# EAGLE board UCirKitBreadboardWithEverything2 (EAGLE 7.3.0), part 1 of 2

Size 72.75 x 99.36 mm. Coordinates in mm from the lower left corner, seen from the top.
Outline: 0,0 72.75,0 72.75,99.36 0,99.36 0,0
Copper layers (1*16): Top 0.035mm / dielectric 1.5mm / Bottom 0.035mm
Design rules "default": minimum track width 10mil, minimum drill 24mil, track to track 8mil, track to pad 8mil, pad to pad 8mil, via to via 8mil, smd to smd 8mil, copper to edge 40mil, drill to drill 8mil, minimum pad ring 10mil, minimum via ring 8mil, stop-mask expansion 4mil, vias tented up to drill 0mil, thermal gap 10mil
Holes 3 mm at 56.11,85.53 17.2,85.34 17.24,8.21 56.07,8.21

## Footprints (pad centres in the part's own frame; a part is rotated, then mirrored left to right if it is on the bottom)
1X01_SMD_3.25X0.85MM_NO_SILK = smd 3.25 x 0.85: P$3 0,0

## Placement (x,y rotation side)
JP301  [1X01_SMD_3.25X0.85MM_NO_SILK]  21.34,83.86 0 top
JP302  [1X01_SMD_3.25X0.85MM_NO_SILK]  24.72,83.86 0 top
JP303  [1X01_SMD_3.25X0.85MM_NO_SILK]  28.1,83.86 0 top
JP304  [1X01_SMD_3.25X0.85MM_NO_SILK]  31.48,83.86 0 top
JP305  [1X01_SMD_3.25X0.85MM_NO_SILK]  34.86,83.86 0 top
JP306  [1X01_SMD_3.25X0.85MM_NO_SILK]  38.24,83.86 0 top
JP307  [1X01_SMD_3.25X0.85MM_NO_SILK]  41.62,83.86 0 top
JP308  [1X01_SMD_3.25X0.85MM_NO_SILK]  45,83.86 0 top
JP309  [1X01_SMD_3.25X0.85MM_NO_SILK]  48.38,83.86 0 top
JP310  [1X01_SMD_3.25X0.85MM_NO_SILK]  51.76,83.86 0 top
JP311  [1X01_SMD_3.25X0.85MM_NO_SILK]  21.34,81.32 0 top
JP312  [1X01_SMD_3.25X0.85MM_NO_SILK]  24.72,81.32 0 top
JP313  [1X01_SMD_3.25X0.85MM_NO_SILK]  28.1,81.32 0 top
JP314  [1X01_SMD_3.25X0.85MM_NO_SILK]  31.48,81.32 0 top
JP315  [1X01_SMD_3.25X0.85MM_NO_SILK]  34.86,81.32 0 top
JP316  [1X01_SMD_3.25X0.85MM_NO_SILK]  38.24,81.32 0 top
JP317  [1X01_SMD_3.25X0.85MM_NO_SILK]  41.62,81.32 0 top
JP318  [1X01_SMD_3.25X0.85MM_NO_SILK]  45,81.32 0 top
JP319  [1X01_SMD_3.25X0.85MM_NO_SILK]  48.38,81.32 0 top
JP320  [1X01_SMD_3.25X0.85MM_NO_SILK]  51.76,81.32 0 top
JP321  [1X01_SMD_3.25X0.85MM_NO_SILK]  21.34,78.78 0 top
JP322  [1X01_SMD_3.25X0.85MM_NO_SILK]  24.72,78.78 0 top
JP323  [1X01_SMD_3.25X0.85MM_NO_SILK]  28.1,78.78 0 top
JP324  [1X01_SMD_3.25X0.85MM_NO_SILK]  31.48,78.78 0 top
JP325  [1X01_SMD_3.25X0.85MM_NO_SILK]  34.86,78.78 0 top
JP326  [1X01_SMD_3.25X0.85MM_NO_SILK]  38.24,78.78 0 top
JP327  [1X01_SMD_3.25X0.85MM_NO_SILK]  41.62,78.78 0 top
JP328  [1X01_SMD_3.25X0.85MM_NO_SILK]  45,78.78 0 top
JP329  [1X01_SMD_3.25X0.85MM_NO_SILK]  48.38,78.78 0 top
JP330  [1X01_SMD_3.25X0.85MM_NO_SILK]  51.76,78.78 0 top
JP331  [1X01_SMD_3.25X0.85MM_NO_SILK]  21.34,76.24 0 top
JP332  [1X01_SMD_3.25X0.85MM_NO_SILK]  24.72,76.24 0 top
JP333  [1X01_SMD_3.25X0.85MM_NO_SILK]  28.1,76.24 0 top
JP334  [1X01_SMD_3.25X0.85MM_NO_SILK]  31.48,76.24 0 top
JP335  [1X01_SMD_3.25X0.85MM_NO_SILK]  34.86,76.24 0 top
JP336  [1X01_SMD_3.25X0.85MM_NO_SILK]  38.24,76.24 0 top
JP337  [1X01_SMD_3.25X0.85MM_NO_SILK]  41.62,76.24 0 top
JP338  [1X01_SMD_3.25X0.85MM_NO_SILK]  45,76.24 0 top
JP339  [1X01_SMD_3.25X0.85MM_NO_SILK]  48.38,76.24 0 top
JP340  [1X01_SMD_3.25X0.85MM_NO_SILK]  51.76,76.24 0 top
JP341  [1X01_SMD_3.25X0.85MM_NO_SILK]  21.34,73.7 0 top
JP342  [1X01_SMD_3.25X0.85MM_NO_SILK]  24.72,73.7 0 top
JP343  [1X01_SMD_3.25X0.85MM_NO_SILK]  28.1,73.7 0 top
JP344  [1X01_SMD_3.25X0.85MM_NO_SILK]  31.48,73.7 0 top
JP345  [1X01_SMD_3.25X0.85MM_NO_SILK]  34.86,73.7 0 top
JP346  [1X01_SMD_3.25X0.85MM_NO_SILK]  38.24,73.7 0 top
JP347  [1X01_SMD_3.25X0.85MM_NO_SILK]  41.62,73.7 0 top
JP348  [1X01_SMD_3.25X0.85MM_NO_SILK]  45,73.7 0 top
JP349  [1X01_SMD_3.25X0.85MM_NO_SILK]  48.38,73.7 0 top
JP350  [1X01_SMD_3.25X0.85MM_NO_SILK]  51.76,73.7 0 top
JP351  [1X01_SMD_3.25X0.85MM_NO_SILK]  21.34,71.16 0 top
JP352  [1X01_SMD_3.25X0.85MM_NO_SILK]  24.72,71.16 0 top
JP353  [1X01_SMD_3.25X0.85MM_NO_SILK]  28.1,71.16 0 top
JP354  [1X01_SMD_3.25X0.85MM_NO_SILK]  31.48,71.16 0 top
JP355  [1X01_SMD_3.25X0.85MM_NO_SILK]  34.86,71.16 0 top
JP356  [1X01_SMD_3.25X0.85MM_NO_SILK]  38.24,71.16 0 top
JP357  [1X01_SMD_3.25X0.85MM_NO_SILK]  41.62,71.16 0 top
JP358  [1X01_SMD_3.25X0.85MM_NO_SILK]  45,71.16 0 top
JP359  [1X01_SMD_3.25X0.85MM_NO_SILK]  48.38,71.16 0 top
JP360  [1X01_SMD_3.25X0.85MM_NO_SILK]  51.76,71.16 0 top
JP361  [1X01_SMD_3.25X0.85MM_NO_SILK]  21.34,68.62 0 top
JP362  [1X01_SMD_3.25X0.85MM_NO_SILK]  24.72,68.62 0 top
JP363  [1X01_SMD_3.25X0.85MM_NO_SILK]  28.1,68.62 0 top
JP364  [1X01_SMD_3.25X0.85MM_NO_SILK]  31.48,68.62 0 top
JP365  [1X01_SMD_3.25X0.85MM_NO_SILK]  34.86,68.62 0 top
JP366  [1X01_SMD_3.25X0.85MM_NO_SILK]  38.24,68.62 0 top
JP367  [1X01_SMD_3.25X0.85MM_NO_SILK]  41.62,68.62 0 top
JP368  [1X01_SMD_3.25X0.85MM_NO_SILK]  45,68.62 0 top
JP369  [1X01_SMD_3.25X0.85MM_NO_SILK]  48.38,68.62 0 top
JP370  [1X01_SMD_3.25X0.85MM_NO_SILK]  51.76,68.62 0 top
JP371  [1X01_SMD_3.25X0.85MM_NO_SILK]  21.34,66.08 0 top
JP372  [1X01_SMD_3.25X0.85MM_NO_SILK]  24.72,66.08 0 top
JP373  [1X01_SMD_3.25X0.85MM_NO_SILK]  28.1,66.08 0 top
JP374  [1X01_SMD_3.25X0.85MM_NO_SILK]  31.48,66.08 0 top
JP375  [1X01_SMD_3.25X0.85MM_NO_SILK]  34.86,66.08 0 top
JP376  [1X01_SMD_3.25X0.85MM_NO_SILK]  38.24,66.08 0 top
JP377  [1X01_SMD_3.25X0.85MM_NO_SILK]  41.62,66.08 0 top
JP378  [1X01_SMD_3.25X0.85MM_NO_SILK]  45,66.08 0 top
JP379  [1X01_SMD_3.25X0.85MM_NO_SILK]  48.38,66.08 0 top
JP380  [1X01_SMD_3.25X0.85MM_NO_SILK]  51.76,66.08 0 top
JP381  [1X01_SMD_3.25X0.85MM_NO_SILK]  21.34,63.54 0 top
JP382  [1X01_SMD_3.25X0.85MM_NO_SILK]  24.72,63.54 0 top
JP383  [1X01_SMD_3.25X0.85MM_NO_SILK]  28.1,63.54 0 top
JP384  [1X01_SMD_3.25X0.85MM_NO_SILK]  31.48,63.54 0 top
JP385  [1X01_SMD_3.25X0.85MM_NO_SILK]  34.86,63.54 0 top
JP386  [1X01_SMD_3.25X0.85MM_NO_SILK]  38.24,63.54 0 top
JP387  [1X01_SMD_3.25X0.85MM_NO_SILK]  41.62,63.54 0 top
JP388  [1X01_SMD_3.25X0.85MM_NO_SILK]  45,63.54 0 top
JP389  [1X01_SMD_3.25X0.85MM_NO_SILK]  48.38,63.54 0 top
JP390  [1X01_SMD_3.25X0.85MM_NO_SILK]  51.76,63.54 0 top
JP391  [1X01_SMD_3.25X0.85MM_NO_SILK]  21.34,61 0 top
JP392  [1X01_SMD_3.25X0.85MM_NO_SILK]  24.72,61 0 top
JP393  [1X01_SMD_3.25X0.85MM_NO_SILK]  28.1,61 0 top
JP394  [1X01_SMD_3.25X0.85MM_NO_SILK]  31.48,61 0 top
JP395  [1X01_SMD_3.25X0.85MM_NO_SILK]  34.86,61 0 top
JP396  [1X01_SMD_3.25X0.85MM_NO_SILK]  38.24,61 0 top
JP397  [1X01_SMD_3.25X0.85MM_NO_SILK]  41.62,61 0 top
JP398  [1X01_SMD_3.25X0.85MM_NO_SILK]  45,61 0 top
JP399  [1X01_SMD_3.25X0.85MM_NO_SILK]  48.38,61 0 top
JP400  [1X01_SMD_3.25X0.85MM_NO_SILK]  51.76,61 0 top
JP401  [1X01_SMD_3.25X0.85MM_NO_SILK]  21.34,58.46 0 top
JP402  [1X01_SMD_3.25X0.85MM_NO_SILK]  24.72,58.46 0 top
JP403  [1X01_SMD_3.25X0.85MM_NO_SILK]  28.1,58.46 0 top
JP404  [1X01_SMD_3.25X0.85MM_NO_SILK]  31.48,58.46 0 top
JP405  [1X01_SMD_3.25X0.85MM_NO_SILK]  34.86,58.46 0 top
JP406  [1X01_SMD_3.25X0.85MM_NO_SILK]  38.24,58.46 0 top
JP407  [1X01_SMD_3.25X0.85MM_NO_SILK]  41.62,58.46 0 top
JP408  [1X01_SMD_3.25X0.85MM_NO_SILK]  45,58.46 0 top
JP409  [1X01_SMD_3.25X0.85MM_NO_SILK]  48.38,58.46 0 top
JP410  [1X01_SMD_3.25X0.85MM_NO_SILK]  51.76,58.46 0 top
JP411  [1X01_SMD_3.25X0.85MM_NO_SILK]  21.34,55.92 0 top
JP412  [1X01_SMD_3.25X0.85MM_NO_SILK]  24.72,55.92 0 top
JP413  [1X01_SMD_3.25X0.85MM_NO_SILK]  28.1,55.92 0 top
JP414  [1X01_SMD_3.25X0.85MM_NO_SILK]  31.48,55.92 0 top
JP415  [1X01_SMD_3.25X0.85MM_NO_SILK]  34.86,55.92 0 top
JP416  [1X01_SMD_3.25X0.85MM_NO_SILK]  38.24,55.92 0 top
JP417  [1X01_SMD_3.25X0.85MM_NO_SILK]  41.62,55.92 0 top
JP418  [1X01_SMD_3.25X0.85MM_NO_SILK]  45,55.92 0 top
JP419  [1X01_SMD_3.25X0.85MM_NO_SILK]  48.38,55.92 0 top
JP420  [1X01_SMD_3.25X0.85MM_NO_SILK]  51.76,55.92 0 top
JP421  [1X01_SMD_3.25X0.85MM_NO_SILK]  21.34,53.38 0 top
JP422  [1X01_SMD_3.25X0.85MM_NO_SILK]  24.72,53.38 0 top
JP423  [1X01_SMD_3.25X0.85MM_NO_SILK]  28.1,53.38 0 top
JP424  [1X01_SMD_3.25X0.85MM_NO_SILK]  31.48,53.38 0 top
JP425  [1X01_SMD_3.25X0.85MM_NO_SILK]  34.86,53.38 0 top
JP426  [1X01_SMD_3.25X0.85MM_NO_SILK]  38.24,53.38 0 top
JP427  [1X01_SMD_3.25X0.85MM_NO_SILK]  41.62,53.38 0 top
JP428  [1X01_SMD_3.25X0.85MM_NO_SILK]  45,53.38 0 top
JP429  [1X01_SMD_3.25X0.85MM_NO_SILK]  48.38,53.38 0 top
JP430  [1X01_SMD_3.25X0.85MM_NO_SILK]  51.76,53.38 0 top
JP431  [1X01_SMD_3.25X0.85MM_NO_SILK]  21.34,50.84 0 top
JP432  [1X01_SMD_3.25X0.85MM_NO_SILK]  24.72,50.84 0 top
JP433  [1X01_SMD_3.25X0.85MM_NO_SILK]  28.1,50.84 0 top
JP434  [1X01_SMD_3.25X0.85MM_NO_SILK]  31.48,50.84 0 top
JP435  [1X01_SMD_3.25X0.85MM_NO_SILK]  34.86,50.84 0 top
JP436  [1X01_SMD_3.25X0.85MM_NO_SILK]  38.24,50.84 0 top
JP437  [1X01_SMD_3.25X0.85MM_NO_SILK]  41.62,50.84 0 top
JP438  [1X01_SMD_3.25X0.85MM_NO_SILK]  45,50.84 0 top
JP439  [1X01_SMD_3.25X0.85MM_NO_SILK]  48.38,50.84 0 top
JP440  [1X01_SMD_3.25X0.85MM_NO_SILK]  51.76,50.84 0 top
JP441  [1X01_SMD_3.25X0.85MM_NO_SILK]  21.34,48.3 0 top
JP442  [1X01_SMD_3.25X0.85MM_NO_SILK]  24.72,48.3 0 top
JP443  [1X01_SMD_3.25X0.85MM_NO_SILK]  28.1,48.3 0 top
JP444  [1X01_SMD_3.25X0.85MM_NO_SILK]  31.48,48.3 0 top
JP445  [1X01_SMD_3.25X0.85MM_NO_SILK]  34.86,48.3 0 top
JP446  [1X01_SMD_3.25X0.85MM_NO_SILK]  38.24,48.3 0 top
JP447  [1X01_SMD_3.25X0.85MM_NO_SILK]  41.62,48.3 0 top
JP448  [1X01_SMD_3.25X0.85MM_NO_SILK]  45,48.3 0 top
JP449  [1X01_SMD_3.25X0.85MM_NO_SILK]  48.38,48.3 0 top
JP450  [1X01_SMD_3.25X0.85MM_NO_SILK]  51.76,48.3 0 top
JP451  [1X01_SMD_3.25X0.85MM_NO_SILK]  21.34,45.76 0 top
JP452  [1X01_SMD_3.25X0.85MM_NO_SILK]  24.72,45.76 0 top
JP453  [1X01_SMD_3.25X0.85MM_NO_SILK]  28.1,45.76 0 top
JP454  [1X01_SMD_3.25X0.85MM_NO_SILK]  31.48,45.76 0 top
JP455  [1X01_SMD_3.25X0.85MM_NO_SILK]  34.86,45.76 0 top
JP456  [1X01_SMD_3.25X0.85MM_NO_SILK]  38.24,45.76 0 top
JP457  [1X01_SMD_3.25X0.85MM_NO_SILK]  41.62,45.76 0 top
JP458  [1X01_SMD_3.25X0.85MM_NO_SILK]  45,45.76 0 top
JP459  [1X01_SMD_3.25X0.85MM_NO_SILK]  48.38,45.76 0 top
JP460  [1X01_SMD_3.25X0.85MM_NO_SILK]  51.76,45.76 0 top
JP461  [1X01_SMD_3.25X0.85MM_NO_SILK]  21.34,43.22 0 top
JP462  [1X01_SMD_3.25X0.85MM_NO_SILK]  24.72,43.22 0 top
JP463  [1X01_SMD_3.25X0.85MM_NO_SILK]  28.1,43.22 0 top
JP464  [1X01_SMD_3.25X0.85MM_NO_SILK]  31.48,43.22 0 top
JP465  [1X01_SMD_3.25X0.85MM_NO_SILK]  34.86,43.22 0 top
JP466  [1X01_SMD_3.25X0.85MM_NO_SILK]  38.24,43.22 0 top
JP467  [1X01_SMD_3.25X0.85MM_NO_SILK]  41.62,43.22 0 top
JP468  [1X01_SMD_3.25X0.85MM_NO_SILK]  45,43.22 0 top
JP469  [1X01_SMD_3.25X0.85MM_NO_SILK]  48.38,43.22 0 top
JP470  [1X01_SMD_3.25X0.85MM_NO_SILK]  51.76,43.22 0 top
JP471  [1X01_SMD_3.25X0.85MM_NO_SILK]  21.34,40.68 0 top
JP472  [1X01_SMD_3.25X0.85MM_NO_SILK]  24.72,40.68 0 top
JP473  [1X01_SMD_3.25X0.85MM_NO_SILK]  28.1,40.68 0 top
JP474  [1X01_SMD_3.25X0.85MM_NO_SILK]  31.48,40.68 0 top
JP475  [1X01_SMD_3.25X0.85MM_NO_SILK]  34.86,40.68 0 top
JP476  [1X01_SMD_3.25X0.85MM_NO_SILK]  38.24,40.68 0 top
JP477  [1X01_SMD_3.25X0.85MM_NO_SILK]  41.62,40.68 0 top
JP478  [1X01_SMD_3.25X0.85MM_NO_SILK]  45,40.68 0 top
JP479  [1X01_SMD_3.25X0.85MM_NO_SILK]  48.38,40.68 0 top
JP480  [1X01_SMD_3.25X0.85MM_NO_SILK]  51.76,40.68 0 top
JP481  [1X01_SMD_3.25X0.85MM_NO_SILK]  21.34,38.14 0 top
JP482  [1X01_SMD_3.25X0.85MM_NO_SILK]  24.72,38.14 0 top
JP483  [1X01_SMD_3.25X0.85MM_NO_SILK]  28.1,38.14 0 top
JP484  [1X01_SMD_3.25X0.85MM_NO_SILK]  31.48,38.14 0 top
JP485  [1X01_SMD_3.25X0.85MM_NO_SILK]  34.86,38.14 0 top
JP486  [1X01_SMD_3.25X0.85MM_NO_SILK]  38.24,38.14 0 top
JP487  [1X01_SMD_3.25X0.85MM_NO_SILK]  41.62,38.14 0 top
JP488  [1X01_SMD_3.25X0.85MM_NO_SILK]  45,38.14 0 top
JP489  [1X01_SMD_3.25X0.85MM_NO_SILK]  48.38,38.14 0 top
JP490  [1X01_SMD_3.25X0.85MM_NO_SILK]  51.76,38.14 0 top
JP491  [1X01_SMD_3.25X0.85MM_NO_SILK]  21.34,35.6 0 top
JP492  [1X01_SMD_3.25X0.85MM_NO_SILK]  24.72,35.6 0 top
JP493  [1X01_SMD_3.25X0.85MM_NO_SILK]  28.1,35.6 0 top
JP494  [1X01_SMD_3.25X0.85MM_NO_SILK]  31.48,35.6 0 top
JP495  [1X01_SMD_3.25X0.85MM_NO_SILK]  34.86,35.6 0 top
JP496  [1X01_SMD_3.25X0.85MM_NO_SILK]  38.24,35.6 0 top
JP497  [1X01_SMD_3.25X0.85MM_NO_SILK]  41.62,35.6 0 top
JP498  [1X01_SMD_3.25X0.85MM_NO_SILK]  45,35.6 0 top
JP499  [1X01_SMD_3.25X0.85MM_NO_SILK]  48.38,35.6 0 top
JP500  [1X01_SMD_3.25X0.85MM_NO_SILK]  51.76,35.6 0 top
JP501  [1X01_SMD_3.25X0.85MM_NO_SILK]  21.34,33.06 0 top
JP502  [1X01_SMD_3.25X0.85MM_NO_SILK]  24.72,33.06 0 top
JP503  [1X01_SMD_3.25X0.85MM_NO_SILK]  28.1,33.06 0 top
JP504  [1X01_SMD_3.25X0.85MM_NO_SILK]  31.48,33.06 0 top
JP505  [1X01_SMD_3.25X0.85MM_NO_SILK]  34.86,33.06 0 top
JP506  [1X01_SMD_3.25X0.85MM_NO_SILK]  38.24,33.06 0 top
JP507  [1X01_SMD_3.25X0.85MM_NO_SILK]  41.62,33.06 0 top
JP508  [1X01_SMD_3.25X0.85MM_NO_SILK]  45,33.06 0 top
JP509  [1X01_SMD_3.25X0.85MM_NO_SILK]  48.38,33.06 0 top
JP510  [1X01_SMD_3.25X0.85MM_NO_SILK]  51.76,33.06 0 top
JP511  [1X01_SMD_3.25X0.85MM_NO_SILK]  21.34,30.52 0 top
JP512  [1X01_SMD_3.25X0.85MM_NO_SILK]  24.72,30.52 0 top
JP513  [1X01_SMD_3.25X0.85MM_NO_SILK]  28.1,30.52 0 top
JP514  [1X01_SMD_3.25X0.85MM_NO_SILK]  31.48,30.52 0 top
JP515  [1X01_SMD_3.25X0.85MM_NO_SILK]  34.86,30.52 0 top
JP516  [1X01_SMD_3.25X0.85MM_NO_SILK]  38.24,30.52 0 top
JP517  [1X01_SMD_3.25X0.85MM_NO_SILK]  41.62,30.52 0 top
JP518  [1X01_SMD_3.25X0.85MM_NO_SILK]  45,30.52 0 top
JP519  [1X01_SMD_3.25X0.85MM_NO_SILK]  48.38,30.52 0 top
JP520  [1X01_SMD_3.25X0.85MM_NO_SILK]  51.76,30.52 0 top
JP521  [1X01_SMD_3.25X0.85MM_NO_SILK]  21.34,27.98 0 top
JP522  [1X01_SMD_3.25X0.85MM_NO_SILK]  24.72,27.98 0 top
JP523  [1X01_SMD_3.25X0.85MM_NO_SILK]  28.1,27.98 0 top
JP524  [1X01_SMD_3.25X0.85MM_NO_SILK]  31.48,27.98 0 top
JP525  [1X01_SMD_3.25X0.85MM_NO_SILK]  34.86,27.98 0 top
JP526  [1X01_SMD_3.25X0.85MM_NO_SILK]  38.24,27.98 0 top
JP527  [1X01_SMD_3.25X0.85MM_NO_SILK]  41.62,27.98 0 top
JP528  [1X01_SMD_3.25X0.85MM_NO_SILK]  45,27.98 0 top
JP529  [1X01_SMD_3.25X0.85MM_NO_SILK]  48.38,27.98 0 top
JP530  [1X01_SMD_3.25X0.85MM_NO_SILK]  51.76,27.98 0 top
JP531  [1X01_SMD_3.25X0.85MM_NO_SILK]  21.34,25.44 0 top
JP532  [1X01_SMD_3.25X0.85MM_NO_SILK]  24.72,25.44 0 top
JP533  [1X01_SMD_3.25X0.85MM_NO_SILK]  28.1,25.44 0 top
JP534  [1X01_SMD_3.25X0.85MM_NO_SILK]  31.48,25.44 0 top
JP535  [1X01_SMD_3.25X0.85MM_NO_SILK]  34.86,25.44 0 top
JP536  [1X01_SMD_3.25X0.85MM_NO_SILK]  38.24,25.44 0 top
JP537  [1X01_SMD_3.25X0.85MM_NO_SILK]  41.62,25.44 0 top
JP538  [1X01_SMD_3.25X0.85MM_NO_SILK]  45,25.44 0 top
JP539  [1X01_SMD_3.25X0.85MM_NO_SILK]  48.38,25.44 0 top
JP540  [1X01_SMD_3.25X0.85MM_NO_SILK]  51.76,25.44 0 top
JP541  [1X01_SMD_3.25X0.85MM_NO_SILK]  21.34,22.9 0 top
JP542  [1X01_SMD_3.25X0.85MM_NO_SILK]  24.72,22.9 0 top
JP543  [1X01_SMD_3.25X0.85MM_NO_SILK]  28.1,22.9 0 top
JP544  [1X01_SMD_3.25X0.85MM_NO_SILK]  31.48,22.9 0 top
JP545  [1X01_SMD_3.25X0.85MM_NO_SILK]  34.86,22.9 0 top
JP546  [1X01_SMD_3.25X0.85MM_NO_SILK]  38.24,22.9 0 top
JP547  [1X01_SMD_3.25X0.85MM_NO_SILK]  41.62,22.9 0 top
JP548  [1X01_SMD_3.25X0.85MM_NO_SILK]  45,22.9 0 top
JP549  [1X01_SMD_3.25X0.85MM_NO_SILK]  48.38,22.9 0 top
JP550  [1X01_SMD_3.25X0.85MM_NO_SILK]  51.76,22.9 0 top
JP551  [1X01_SMD_3.25X0.85MM_NO_SILK]  21.34,20.36 0 top
JP552  [1X01_SMD_3.25X0.85MM_NO_SILK]  24.72,20.36 0 top
JP553  [1X01_SMD_3.25X0.85MM_NO_SILK]  28.1,20.36 0 top
JP554  [1X01_SMD_3.25X0.85MM_NO_SILK]  31.48,20.36 0 top
JP555  [1X01_SMD_3.25X0.85MM_NO_SILK]  34.86,20.36 0 top
JP556  [1X01_SMD_3.25X0.85MM_NO_SILK]  38.24,20.36 0 top
JP557  [1X01_SMD_3.25X0.85MM_NO_SILK]  41.62,20.36 0 top
JP558  [1X01_SMD_3.25X0.85MM_NO_SILK]  45,20.36 0 top
JP559  [1X01_SMD_3.25X0.85MM_NO_SILK]  48.38,20.36 0 top
JP560  [1X01_SMD_3.25X0.85MM_NO_SILK]  51.76,20.36 0 top
JP561  [1X01_SMD_3.25X0.85MM_NO_SILK]  21.34,17.82 0 top
JP562  [1X01_SMD_3.25X0.85MM_NO_SILK]  24.72,17.82 0 top
JP563  [1X01_SMD_3.25X0.85MM_NO_SILK]  28.1,17.82 0 top
JP564  [1X01_SMD_3.25X0.85MM_NO_SILK]  31.48,17.82 0 top
JP565  [1X01_SMD_3.25X0.85MM_NO_SILK]  34.86,17.82 0 top
JP566  [1X01_SMD_3.25X0.85MM_NO_SILK]  38.24,17.82 0 top
JP567  [1X01_SMD_3.25X0.85MM_NO_SILK]  41.62,17.82 0 top
JP568  [1X01_SMD_3.25X0.85MM_NO_SILK]  45,17.82 0 top
JP569  [1X01_SMD_3.25X0.85MM_NO_SILK]  48.38,17.82 0 top
JP570  [1X01_SMD_3.25X0.85MM_NO_SILK]  51.76,17.82 0 top
JP571  [1X01_SMD_3.25X0.85MM_NO_SILK]  21.34,15.28 0 top
JP572  [1X01_SMD_3.25X0.85MM_NO_SILK]  24.72,15.28 0 top
JP573  [1X01_SMD_3.25X0.85MM_NO_SILK]  28.1,15.28 0 top
JP574  [1X01_SMD_3.25X0.85MM_NO_SILK]  31.48,15.28 0 top
JP575  [1X01_SMD_3.25X0.85MM_NO_SILK]  34.86,15.28 0 top
JP576  [1X01_SMD_3.25X0.85MM_NO_SILK]  38.24,15.28 0 top
JP577  [1X01_SMD_3.25X0.85MM_NO_SILK]  41.62,15.28 0 top
JP578  [1X01_SMD_3.25X0.85MM_NO_SILK]  45,15.28 0 top
JP579  [1X01_SMD_3.25X0.85MM_NO_SILK]  48.38,15.28 0 top
JP580  [1X01_SMD_3.25X0.85MM_NO_SILK]  51.76,15.28 0 top
JP581  [1X01_SMD_3.25X0.85MM_NO_SILK]  21.34,12.74 0 top
JP582  [1X01_SMD_3.25X0.85MM_NO_SILK]  24.72,12.74 0 top
JP583  [1X01_SMD_3.25X0.85MM_NO_SILK]  28.1,12.74 0 top
JP584  [1X01_SMD_3.25X0.85MM_NO_SILK]  31.48,12.74 0 top
JP585  [1X01_SMD_3.25X0.85MM_NO_SILK]  34.86,12.74 0 top
JP586  [1X01_SMD_3.25X0.85MM_NO_SILK]  38.24,12.74 0 top
JP587  [1X01_SMD_3.25X0.85MM_NO_SILK]  41.62,12.74 0 top
JP588  [1X01_SMD_3.25X0.85MM_NO_SILK]  45,12.74 0 top
JP589  [1X01_SMD_3.25X0.85MM_NO_SILK]  48.38,12.74 0 top
JP590  [1X01_SMD_3.25X0.85MM_NO_SILK]  51.76,12.74 0 top
JP591  [1X01_SMD_3.25X0.85MM_NO_SILK]  21.34,10.2 0 top
JP592  [1X01_SMD_3.25X0.85MM_NO_SILK]  24.72,10.2 0 top
JP593  [1X01_SMD_3.25X0.85MM_NO_SILK]  28.1,10.2 0 top
JP594  [1X01_SMD_3.25X0.85MM_NO_SILK]  31.48,10.2 0 top
JP595  [1X01_SMD_3.25X0.85MM_NO_SILK]  34.86,10.2 0 top
JP596  [1X01_SMD_3.25X0.85MM_NO_SILK]  38.24,10.2 0 top
JP597  [1X01_SMD_3.25X0.85MM_NO_SILK]  41.62,10.2 0 top
JP598  [1X01_SMD_3.25X0.85MM_NO_SILK]  45,10.2 0 top
JP599  [1X01_SMD_3.25X0.85MM_NO_SILK]  48.38,10.2 0 top
JP600  [1X01_SMD_3.25X0.85MM_NO_SILK]  51.76,10.2 0 top
JP601  [1X01_SMD_3.25X0.85MM_NO_SILK]  40.85,89.47 90 top
JP602  [1X01_SMD_3.25X0.85MM_NO_SILK]  42.12,89.47 90 top
JP603  [1X01_SMD_3.25X0.85MM_NO_SILK]  43.39,89.47 90 top
JP604  [1X01_SMD_3.25X0.85MM_NO_SILK]  44.66,89.47 90 top
JP605  [1X01_SMD_3.25X0.85MM_NO_SILK]  45.93,89.47 90 top
JP606  [1X01_SMD_3.25X0.85MM_NO_SILK]  47.2,89.47 90 top
JP607  [1X01_SMD_3.25X0.85MM_NO_SILK]  48.47,89.47 90 top
JP608  [1X01_SMD_3.25X0.85MM_NO_SILK]  49.74,89.47 90 top
JP609  [1X01_SMD_3.25X0.85MM_NO_SILK]  51.01,89.47 90 top
JP610  [1X01_SMD_3.25X0.85MM_NO_SILK]  52.28,89.47 90 top
JP611  [1X01_SMD_3.25X0.85MM_NO_SILK]  40.83,93.71 90 top
JP612  [1X01_SMD_3.25X0.85MM_NO_SILK]  42.1,93.71 90 top
JP613  [1X01_SMD_3.25X0.85MM_NO_SILK]  43.37,93.71 90 top
JP614  [1X01_SMD_3.25X0.85MM_NO_SILK]  44.64,93.71 90 top
JP615  [1X01_SMD_3.25X0.85MM_NO_SILK]  45.91,93.71 90 top
JP616  [1X01_SMD_3.25X0.85MM_NO_SILK]  47.18,93.71 90 top
JP617  [1X01_SMD_3.25X0.85MM_NO_SILK]  48.45,93.71 90 top
JP618  [1X01_SMD_3.25X0.85MM_NO_SILK]  49.72,93.71 90 top
JP619  [1X01_SMD_3.25X0.85MM_NO_SILK]  50.99,93.71 90 top
JP620  [1X01_SMD_3.25X0.85MM_NO_SILK]  52.26,93.71 90 top
JP621  [1X01_SMD_3.25X0.85MM_NO_SILK]  20.43,93.63 90 top
JP622  [1X01_SMD_3.25X0.85MM_NO_SILK]  21.7,93.63 90 top
JP623  [1X01_SMD_3.25X0.85MM_NO_SILK]  22.97,93.63 90 top
JP624  [1X01_SMD_3.25X0.85MM_NO_SILK]  24.24,93.63 90 top
JP625  [1X01_SMD_3.25X0.85MM_NO_SILK]  25.51,93.63 90 top
JP626  [1X01_SMD_3.25X0.85MM_NO_SILK]  26.78,93.63 90 top
JP627  [1X01_SMD_3.25X0.85MM_NO_SILK]  28.05,93.63 90 top
JP628  [1X01_SMD_3.25X0.85MM_NO_SILK]  29.32,93.63 90 top
JP629  [1X01_SMD_3.25X0.85MM_NO_SILK]  30.59,93.63 90 top
JP630  [1X01_SMD_3.25X0.85MM_NO_SILK]  31.86,93.63 90 top
JP631  [1X01_SMD_3.25X0.85MM_NO_SILK]  20.48,89.4 90 top
JP632  [1X01_SMD_3.25X0.85MM_NO_SILK]  21.75,89.4 90 top
JP633  [1X01_SMD_3.25X0.85MM_NO_SILK]  23.02,89.4 90 top
JP634  [1X01_SMD_3.25X0.85MM_NO_SILK]  24.29,89.4 90 top
JP635  [1X01_SMD_3.25X0.85MM_NO_SILK]  25.56,89.4 90 top
JP636  [1X01_SMD_3.25X0.85MM_NO_SILK]  26.83,89.4 90 top
JP637  [1X01_SMD_3.25X0.85MM_NO_SILK]  28.1,89.4 90 top
JP638  [1X01_SMD_3.25X0.85MM_NO_SILK]  29.37,89.4 90 top
JP639  [1X01_SMD_3.25X0.85MM_NO_SILK]  30.64,89.4 90 top
JP640  [1X01_SMD_3.25X0.85MM_NO_SILK]  31.91,89.4 90 top
JP641  [1X01_SMD_3.25X0.85MM_NO_SILK]  41.11,5.77 90 top
JP642  [1X01_SMD_3.25X0.85MM_NO_SILK]  42.38,5.77 90 top
JP643  [1X01_SMD_3.25X0.85MM_NO_SILK]  43.65,5.77 90 top
JP644  [1X01_SMD_3.25X0.85MM_NO_SILK]  44.92,5.77 90 top
JP645  [1X01_SMD_3.25X0.85MM_NO_SILK]  46.19,5.77 90 top
JP646  [1X01_SMD_3.25X0.85MM_NO_SILK]  47.46,5.77 90 top
JP647  [1X01_SMD_3.25X0.85MM_NO_SILK]  48.73,5.77 90 top
JP648  [1X01_SMD_3.25X0.85MM_NO_SILK]  50,5.77 90 top
JP649  [1X01_SMD_3.25X0.85MM_NO_SILK]  51.27,5.77 90 top
JP650  [1X01_SMD_3.25X0.85MM_NO_SILK]  52.54,5.77 90 top
JP651  [1X01_SMD_3.25X0.85MM_NO_SILK]  20.81,5.77 90 top
JP652  [1X01_SMD_3.25X0.85MM_NO_SILK]  22.08,5.77 90 top
JP653  [1X01_SMD_3.25X0.85MM_NO_SILK]  23.35,5.77 90 top
JP654  [1X01_SMD_3.25X0.85MM_NO_SILK]  24.62,5.77 90 top
JP655  [1X01_SMD_3.25X0.85MM_NO_SILK]  25.89,5.77 90 top
JP656  [1X01_SMD_3.25X0.85MM_NO_SILK]  27.16,5.77 90 top
JP657  [1X01_SMD_3.25X0.85MM_NO_SILK]  28.43,5.77 90 top
JP658  [1X01_SMD_3.25X0.85MM_NO_SILK]  29.7,5.77 90 top
JP659  [1X01_SMD_3.25X0.85MM_NO_SILK]  30.97,5.77 90 top
JP660  [1X01_SMD_3.25X0.85MM_NO_SILK]  32.24,5.77 90 top
JP661  [1X01_SMD_3.25X0.85MM_NO_SILK]  6.93,84.23 0 top
JP662  [1X01_SMD_3.25X0.85MM_NO_SILK]  6.93,82.96 0 top
JP663  [1X01_SMD_3.25X0.85MM_NO_SILK]  6.93,81.69 0 top
JP664  [1X01_SMD_3.25X0.85MM_NO_SILK]  6.93,80.42 0 top
JP665  [1X01_SMD_3.25X0.85MM_NO_SILK]  6.93,79.15 0 top
JP666  [1X01_SMD_3.25X0.85MM_NO_SILK]  6.93,77.88 0 top
JP667  [1X01_SMD_3.25X0.85MM_NO_SILK]  6.93,76.61 0 top
JP668  [1X01_SMD_3.25X0.85MM_NO_SILK]  6.93,75.34 0 top
JP669  [1X01_SMD_3.25X0.85MM_NO_SILK]  6.93,74.07 0 top
JP670  [1X01_SMD_3.25X0.85MM_NO_SILK]  6.93,72.8 0 top
JP671  [1X01_SMD_3.25X0.85MM_NO_SILK]  6.93,71.53 0 top
JP672  [1X01_SMD_3.25X0.85MM_NO_SILK]  6.93,70.26 0 top
JP673  [1X01_SMD_3.25X0.85MM_NO_SILK]  6.93,68.99 0 top
JP674  [1X01_SMD_3.25X0.85MM_NO_SILK]  6.93,67.72 0 top
JP675  [1X01_SMD_3.25X0.85MM_NO_SILK]  6.93,66.45 0 top
JP676  [1X01_SMD_3.25X0.85MM_NO_SILK]  6.93,65.18 0 top
JP677  [1X01_SMD_3.25X0.85MM_NO_SILK]  6.93,63.91 0 top
JP678  [1X01_SMD_3.25X0.85MM_NO_SILK]  6.93,62.64 0 top
JP679  [1X01_SMD_3.25X0.85MM_NO_SILK]  6.93,61.37 0 top
JP680  [1X01_SMD_3.25X0.85MM_NO_SILK]  6.93,60.1 0 top
JP681  [1X01_SMD_3.25X0.85MM_NO_SILK]  6.93,58.83 0 top
JP682  [1X01_SMD_3.25X0.85MM_NO_SILK]  6.93,57.56 0 top
JP683  [1X01_SMD_3.25X0.85MM_NO_SILK]  6.93,56.29 0 top
JP684  [1X01_SMD_3.25X0.85MM_NO_SILK]  6.93,55.02 0 top
JP685  [1X01_SMD_3.25X0.85MM_NO_SILK]  6.93,53.75 0 top
JP686  [1X01_SMD_3.25X0.85MM_NO_SILK]  6.93,52.48 0 top
JP687  [1X01_SMD_3.25X0.85MM_NO_SILK]  6.93,51.21 0 top
JP688  [1X01_SMD_3.25X0.85MM_NO_SILK]  6.93,49.94 0 top
JP689  [1X01_SMD_3.25X0.85MM_NO_SILK]  6.93,48.67 0 top
JP690  [1X01_SMD_3.25X0.85MM_NO_SILK]  6.93,47.4 0 top
JP691  [1X01_SMD_3.25X0.85MM_NO_SILK]  6.93,46.13 0 top
JP692  [1X01_SMD_3.25X0.85MM_NO_SILK]  6.93,44.86 0 top
JP693  [1X01_SMD_3.25X0.85MM_NO_SILK]  6.93,43.59 0 top
JP694  [1X01_SMD_3.25X0.85MM_NO_SILK]  6.93,42.32 0 top
JP695  [1X01_SMD_3.25X0.85MM_NO_SILK]  6.93,41.05 0 top
JP696  [1X01_SMD_3.25X0.85MM_NO_SILK]  6.93,39.78 0 top
JP697  [1X01_SMD_3.25X0.85MM_NO_SILK]  6.93,38.51 0 top
JP698  [1X01_SMD_3.25X0.85MM_NO_SILK]  6.93,37.24 0 top
JP699  [1X01_SMD_3.25X0.85MM_NO_SILK]  6.93,35.97 0 top
JP700  [1X01_SMD_3.25X0.85MM_NO_SILK]  6.93,34.7 0 top
JP701  [1X01_SMD_3.25X0.85MM_NO_SILK]  6.93,33.43 0 top
JP702  [1X01_SMD_3.25X0.85MM_NO_SILK]  6.93,32.16 0 top
JP703  [1X01_SMD_3.25X0.85MM_NO_SILK]  6.93,30.89 0 top
JP704  [1X01_SMD_3.25X0.85MM_NO_SILK]  6.93,29.62 0 top
JP705  [1X01_SMD_3.25X0.85MM_NO_SILK]  6.93,28.35 0 top
JP706  [1X01_SMD_3.25X0.85MM_NO_SILK]  6.93,27.08 0 top
JP707  [1X01_SMD_3.25X0.85MM_NO_SILK]  6.93,25.81 0 top
JP708  [1X01_SMD_3.25X0.85MM_NO_SILK]  6.93,24.54 0 top
JP709  [1X01_SMD_3.25X0.85MM_NO_SILK]  6.93,14.31 0 top
JP710  [1X01_SMD_3.25X0.85MM_NO_SILK]  6.9,16.87 0 top
JP711  [1X01_SMD_3.25X0.85MM_NO_SILK]  6.95,13.05 180 top
JP712  [1X01_SMD_3.25X0.85MM_NO_SILK]  6.92,18.15 180 top
JP713  [1X01_SMD_3.25X0.85MM_NO_SILK]  6.92,19.42 180 top
JP714  [1X01_SMD_3.25X0.85MM_NO_SILK]  6.95,10.52 0 top
JP715  [1X01_SMD_3.25X0.85MM_NO_SILK]  6.95,9.25 0 top
JP716  [1X01_SMD_3.25X0.85MM_NO_SILK]  6.95,23.17 180 top
JP717  [1X01_SMD_3.25X0.85MM_NO_SILK]  6.97,11.81 180 top
JP718  [1X01_SMD_3.25X0.85MM_NO_SILK]  6.92,20.58 0 top
JP719  [1X01_SMD_3.25X0.85MM_NO_SILK]  6.93,15.57 180 top
JP720  [1X01_SMD_3.25X0.85MM_NO_SILK]  6.97,21.85 180 top
JP721  [1X01_SMD_3.25X0.85MM_NO_SILK]  65.86,84.33 0 top
JP722  [1X01_SMD_3.25X0.85MM_NO_SILK]  65.86,83.06 0 top
JP723  [1X01_SMD_3.25X0.85MM_NO_SILK]  65.86,81.79 0 top
JP724  [1X01_SMD_3.25X0.85MM_NO_SILK]  65.89,78.01 180 top
JP725  [1X01_SMD_3.25X0.85MM_NO_SILK]  65.89,79.28 180 top
JP726  [1X01_SMD_3.25X0.85MM_NO_SILK]  65.89,80.55 180 top
JP727  [1X01_SMD_3.25X0.85MM_NO_SILK]  65.86,76.71 0 top
JP728  [1X01_SMD_3.25X0.85MM_NO_SILK]  65.86,75.44 0 top
JP729  [1X01_SMD_3.25X0.85MM_NO_SILK]  65.86,74.17 0 top
JP730  [1X01_SMD_3.25X0.85MM_NO_SILK]  65.86,72.9 0 top
JP731  [1X01_SMD_3.25X0.85MM_NO_SILK]  65.86,71.63 0 top
JP732  [1X01_SMD_3.25X0.85MM_NO_SILK]  65.86,70.36 0 top
JP733  [1X01_SMD_3.25X0.85MM_NO_SILK]  65.86,69.09 0 top
JP734  [1X01_SMD_3.25X0.85MM_NO_SILK]  65.86,67.82 0 top
JP735  [1X01_SMD_3.25X0.85MM_NO_SILK]  65.86,66.55 0 top
JP736  [1X01_SMD_3.25X0.85MM_NO_SILK]  65.86,65.28 0 top
JP737  [1X01_SMD_3.25X0.85MM_NO_SILK]  65.86,64.01 0 top
JP738  [1X01_SMD_3.25X0.85MM_NO_SILK]  65.86,62.74 0 top
JP739  [1X01_SMD_3.25X0.85MM_NO_SILK]  65.86,61.47 0 top
JP740  [1X01_SMD_3.25X0.85MM_NO_SILK]  65.86,60.2 0 top
JP741  [1X01_SMD_3.25X0.85MM_NO_SILK]  65.86,58.93 0 top
JP742  [1X01_SMD_3.25X0.85MM_NO_SILK]  65.86,57.66 0 top
JP743  [1X01_SMD_3.25X0.85MM_NO_SILK]  65.86,56.39 0 top
JP744  [1X01_SMD_3.25X0.85MM_NO_SILK]  65.86,55.12 0 top
JP745  [1X01_SMD_3.25X0.85MM_NO_SILK]  65.86,53.85 0 top
JP746  [1X01_SMD_3.25X0.85MM_NO_SILK]  65.86,52.58 0 top
JP747  [1X01_SMD_3.25X0.85MM_NO_SILK]  65.86,51.31 0 top
JP748  [1X01_SMD_3.25X0.85MM_NO_SILK]  65.86,50.04 0 top
JP749  [1X01_SMD_3.25X0.85MM_NO_SILK]  65.86,48.77 0 top
JP750  [1X01_SMD_3.25X0.85MM_NO_SILK]  65.86,47.5 0 top
JP751  [1X01_SMD_3.25X0.85MM_NO_SILK]  65.86,46.23 0 top
JP752  [1X01_SMD_3.25X0.85MM_NO_SILK]  65.86,44.96 0 top
JP753  [1X01_SMD_3.25X0.85MM_NO_SILK]  65.86,43.69 0 top
JP754  [1X01_SMD_3.25X0.85MM_NO_SILK]  65.86,42.42 0 top
JP755  [1X01_SMD_3.25X0.85MM_NO_SILK]  65.96,39.87 180 top
JP756  [1X01_SMD_3.25X0.85MM_NO_SILK]  65.96,41.14 180 top
JP757  [1X01_SMD_3.25X0.85MM_NO_SILK]  65.86,38.61 0 top
JP758  [1X01_SMD_3.25X0.85MM_NO_SILK]  65.86,37.34 0 top
JP759  [1X01_SMD_3.25X0.85MM_NO_SILK]  65.86,36.07 0 top
JP760  [1X01_SMD_3.25X0.85MM_NO_SILK]  65.86,34.8 0 top
JP761  [1X01_SMD_3.25X0.85MM_NO_SILK]  65.92,31.04 180 top
JP762  [1X01_SMD_3.25X0.85MM_NO_SILK]  65.92,32.31 180 top
JP763  [1X01_SMD_3.25X0.85MM_NO_SILK]  65.92,33.58 180 top
JP764  [1X01_SMD_3.25X0.85MM_NO_SILK]  65.86,29.72 0 top
JP765  [1X01_SMD_3.25X0.85MM_NO_SILK]  65.86,14.54 180 top
JP766  [1X01_SMD_3.25X0.85MM_NO_SILK]  65.86,15.81 180 top
JP767  [1X01_SMD_3.25X0.85MM_NO_SILK]  65.86,17.08 180 top
JP768  [1X01_SMD_3.25X0.85MM_NO_SILK]  65.86,18.35 180 top
JP769  [1X01_SMD_3.25X0.85MM_NO_SILK]  65.87,9.45 180 top
JP770  [1X01_SMD_3.25X0.85MM_NO_SILK]  65.87,10.72 180 top
JP771  [1X01_SMD_3.25X0.85MM_NO_SILK]  65.87,11.99 180 top
JP772  [1X01_SMD_3.25X0.85MM_NO_SILK]  65.87,13.26 180 top
JP773  [1X01_SMD_3.25X0.85MM_NO_SILK]  65.84,28.47 0 top
JP774  [1X01_SMD_3.25X0.85MM_NO_SILK]  65.84,27.2 0 top
JP775  [1X01_SMD_3.25X0.85MM_NO_SILK]  65.88,19.52 180 top
JP776  [1X01_SMD_3.25X0.85MM_NO_SILK]  65.88,20.79 180 top
JP777  [1X01_SMD_3.25X0.85MM_NO_SILK]  65.88,22.06 180 top
JP778  [1X01_SMD_3.25X0.85MM_NO_SILK]  65.88,23.33 180 top
JP779  [1X01_SMD_3.25X0.85MM_NO_SILK]  65.88,24.6 180 top
JP780  [1X01_SMD_3.25X0.85MM_NO_SILK]  65.88,25.87 180 top
JP781  [1X01_SMD_3.25X0.85MM_NO_SILK]  60.6,84.33 0 top
JP782  [1X01_SMD_3.25X0.85MM_NO_SILK]  60.6,83.06 0 top
JP783  [1X01_SMD_3.25X0.85MM_NO_SILK]  60.6,81.79 0 top
JP784  [1X01_SMD_3.25X0.85MM_NO_SILK]  60.6,80.52 0 top
JP785  [1X01_SMD_3.25X0.85MM_NO_SILK]  60.6,79.25 0 top
JP786  [1X01_SMD_3.25X0.85MM_NO_SILK]  60.6,77.98 0 top
JP787  [1X01_SMD_3.25X0.85MM_NO_SILK]  60.6,76.71 0 top
JP788  [1X01_SMD_3.25X0.85MM_NO_SILK]  60.6,75.44 0 top
JP789  [1X01_SMD_3.25X0.85MM_NO_SILK]  60.6,74.17 0 top
JP790  [1X01_SMD_3.25X0.85MM_NO_SILK]  60.6,72.9 0 top
JP791  [1X01_SMD_3.25X0.85MM_NO_SILK]  60.6,71.63 0 top
JP792  [1X01_SMD_3.25X0.85MM_NO_SILK]  60.6,70.36 0 top
JP793  [1X01_SMD_3.25X0.85MM_NO_SILK]  60.6,69.09 0 top
JP794  [1X01_SMD_3.25X0.85MM_NO_SILK]  60.6,67.82 0 top
JP795  [1X01_SMD_3.25X0.85MM_NO_SILK]  60.6,66.55 0 top
JP796  [1X01_SMD_3.25X0.85MM_NO_SILK]  60.6,65.28 0 top
JP797  [1X01_SMD_3.25X0.85MM_NO_SILK]  60.6,64.01 0 top
JP798  [1X01_SMD_3.25X0.85MM_NO_SILK]  60.6,62.74 0 top
JP799  [1X01_SMD_3.25X0.85MM_NO_SILK]  60.6,61.47 0 top
JP800  [1X01_SMD_3.25X0.85MM_NO_SILK]  60.6,60.2 0 top
JP801  [1X01_SMD_3.25X0.85MM_NO_SILK]  60.6,58.93 0 top
JP802  [1X01_SMD_3.25X0.85MM_NO_SILK]  60.6,57.66 0 top
JP803  [1X01_SMD_3.25X0.85MM_NO_SILK]  60.6,56.39 0 top
JP804  [1X01_SMD_3.25X0.85MM_NO_SILK]  60.6,55.12 0 top
JP805  [1X01_SMD_3.25X0.85MM_NO_SILK]  60.6,53.85 0 top
JP806  [1X01_SMD_3.25X0.85MM_NO_SILK]  60.6,52.58 0 top
JP807  [1X01_SMD_3.25X0.85MM_NO_SILK]  60.6,51.31 0 top
JP808  [1X01_SMD_3.25X0.85MM_NO_SILK]  60.6,50.04 0 top
JP809  [1X01_SMD_3.25X0.85MM_NO_SILK]  60.6,48.77 0 top
JP810  [1X01_SMD_3.25X0.85MM_NO_SILK]  60.6,47.5 0 top
JP811  [1X01_SMD_3.25X0.85MM_NO_SILK]  60.6,46.23 0 top
JP812  [1X01_SMD_3.25X0.85MM_NO_SILK]  60.6,44.96 0 top
JP813  [1X01_SMD_3.25X0.85MM_NO_SILK]  60.6,43.69 0 top
JP814  [1X01_SMD_3.25X0.85MM_NO_SILK]  60.6,42.42 0 top
JP815  [1X01_SMD_3.25X0.85MM_NO_SILK]  60.6,41.15 0 top
JP816  [1X01_SMD_3.25X0.85MM_NO_SILK]  60.6,39.88 0 top
JP817  [1X01_SMD_3.25X0.85MM_NO_SILK]  60.6,38.61 0 top
JP818  [1X01_SMD_3.25X0.85MM_NO_SILK]  60.6,37.34 0 top
JP819  [1X01_SMD_3.25X0.85MM_NO_SILK]  60.6,36.07 0 top
JP820  [1X01_SMD_3.25X0.85MM_NO_SILK]  60.6,34.8 0 top
JP821  [1X01_SMD_3.25X0.85MM_NO_SILK]  60.6,33.53 0 top
JP822  [1X01_SMD_3.25X0.85MM_NO_SILK]  60.6,32.26 0 top
JP823  [1X01_SMD_3.25X0.85MM_NO_SILK]  60.6,30.99 0 top
JP824  [1X01_SMD_3.25X0.85MM_NO_SILK]  60.6,29.72 0 top
JP825  [1X01_SMD_3.25X0.85MM_NO_SILK]  60.6,28.45 0 top
JP826  [1X01_SMD_3.25X0.85MM_NO_SILK]  60.6,27.18 0 top
JP827  [1X01_SMD_3.25X0.85MM_NO_SILK]  60.6,25.91 0 top
JP828  [1X01_SMD_3.25X0.85MM_NO_SILK]  60.6,24.64 0 top
JP829  [1X01_SMD_3.25X0.85MM_NO_SILK]  60.6,23.37 0 top
JP830  [1X01_SMD_3.25X0.85MM_NO_SILK]  60.6,22.1 0 top
JP831  [1X01_SMD_3.25X0.85MM_NO_SILK]  60.6,20.83 0 top
JP832  [1X01_SMD_3.25X0.85MM_NO_SILK]  60.6,19.56 0 top
JP833  [1X01_SMD_3.25X0.85MM_NO_SILK]  60.6,18.29 0 top
JP834  [1X01_SMD_3.25X0.85MM_NO_SILK]  60.6,17.02 0 top
JP835  [1X01_SMD_3.25X0.85MM_NO_SILK]  60.6,15.75 0 top
JP836  [1X01_SMD_3.25X0.85MM_NO_SILK]  60.6,14.48 0 top
JP837  [1X01_SMD_3.25X0.85MM_NO_SILK]  60.6,13.21 0 top
JP838  [1X01_SMD_3.25X0.85MM_NO_SILK]  60.6,11.94 0 top
JP839  [1X01_SMD_3.25X0.85MM_NO_SILK]  60.6,10.67 0 top
JP840  [1X01_SMD_3.25X0.85MM_NO_SILK]  60.6,9.4 0 top
JP841  [1X01_SMD_3.25X0.85MM_NO_SILK]  12.44,84.23 0 top
JP842  [1X01_SMD_3.25X0.85MM_NO_SILK]  12.44,82.96 0 top
JP843  [1X01_SMD_3.25X0.85MM_NO_SILK]  12.44,81.69 0 top
JP844  [1X01_SMD_3.25X0.85MM_NO_SILK]  12.44,80.42 0 top
JP845  [1X01_SMD_3.25X0.85MM_NO_SILK]  12.44,79.15 0 top
JP846  [1X01_SMD_3.25X0.85MM_NO_SILK]  12.44,77.88 0 top
JP847  [1X01_SMD_3.25X0.85MM_NO_SILK]  12.44,76.61 0 top
JP848  [1X01_SMD_3.25X0.85MM_NO_SILK]  12.44,75.34 0 top
JP849  [1X01_SMD_3.25X0.85MM_NO_SILK]  12.44,74.07 0 top
JP850  [1X01_SMD_3.25X0.85MM_NO_SILK]  12.44,72.8 0 top
JP851  [1X01_SMD_3.25X0.85MM_NO_SILK]  12.44,71.53 0 top
JP852  [1X01_SMD_3.25X0.85MM_NO_SILK]  12.44,70.26 0 top
JP853  [1X01_SMD_3.25X0.85MM_NO_SILK]  12.44,68.99 0 top
JP854  [1X01_SMD_3.25X0.85MM_NO_SILK]  12.44,67.72 0 top
JP855  [1X01_SMD_3.25X0.85MM_NO_SILK]  12.44,66.45 0 top
JP856  [1X01_SMD_3.25X0.85MM_NO_SILK]  12.44,65.18 0 top
JP857  [1X01_SMD_3.25X0.85MM_NO_SILK]  12.44,63.91 0 top
JP858  [1X01_SMD_3.25X0.85MM_NO_SILK]  12.44,62.64 0 top
JP859  [1X01_SMD_3.25X0.85MM_NO_SILK]  12.44,61.37 0 top
JP860  [1X01_SMD_3.25X0.85MM_NO_SILK]  12.44,60.1 0 top
JP861  [1X01_SMD_3.25X0.85MM_NO_SILK]  12.44,58.83 0 top
JP862  [1X01_SMD_3.25X0.85MM_NO_SILK]  12.44,57.56 0 top
JP863  [1X01_SMD_3.25X0.85MM_NO_SILK]  12.44,56.29 0 top
JP864  [1X01_SMD_3.25X0.85MM_NO_SILK]  12.44,55.02 0 top
JP865  [1X01_SMD_3.25X0.85MM_NO_SILK]  12.44,53.75 0 top
JP866  [1X01_SMD_3.25X0.85MM_NO_SILK]  12.44,52.48 0 top
JP867  [1X01_SMD_3.25X0.85MM_NO_SILK]  12.44,51.21 0 top
JP868  [1X01_SMD_3.25X0.85MM_NO_SILK]  12.44,49.94 0 top
JP869  [1X01_SMD_3.25X0.85MM_NO_SILK]  12.44,48.67 0 top
JP870  [1X01_SMD_3.25X0.85MM_NO_SILK]  12.44,47.4 0 top
JP871  [1X01_SMD_3.25X0.85MM_NO_SILK]  12.44,46.13 0 top
JP872  [1X01_SMD_3.25X0.85MM_NO_SILK]  12.44,44.86 0 top
JP873  [1X01_SMD_3.25X0.85MM_NO_SILK]  12.44,43.59 0 top
JP874  [1X01_SMD_3.25X0.85MM_NO_SILK]  12.44,42.32 0 top
JP875  [1X01_SMD_3.25X0.85MM_NO_SILK]  12.44,41.05 0 top
JP876  [1X01_SMD_3.25X0.85MM_NO_SILK]  12.44,39.78 0 top
JP877  [1X01_SMD_3.25X0.85MM_NO_SILK]  12.44,38.51 0 top
JP878  [1X01_SMD_3.25X0.85MM_NO_SILK]  12.44,37.24 0 top
JP879  [1X01_SMD_3.25X0.85MM_NO_SILK]  12.44,35.97 0 top
JP880  [1X01_SMD_3.25X0.85MM_NO_SILK]  12.44,34.7 0 top
JP881  [1X01_SMD_3.25X0.85MM_NO_SILK]  12.44,33.43 0 top
JP882  [1X01_SMD_3.25X0.85MM_NO_SILK]  12.44,32.16 0 top
JP883  [1X01_SMD_3.25X0.85MM_NO_SILK]  12.44,30.89 0 top
JP884  [1X01_SMD_3.25X0.85MM_NO_SILK]  12.44,29.62 0 top
JP885  [1X01_SMD_3.25X0.85MM_NO_SILK]  12.44,28.35 0 top
JP886  [1X01_SMD_3.25X0.85MM_NO_SILK]  12.44,27.08 0 top
JP887  [1X01_SMD_3.25X0.85MM_NO_SILK]  12.44,25.81 0 top
JP888  [1X01_SMD_3.25X0.85MM_NO_SILK]  12.44,24.54 0 top
JP889  [1X01_SMD_3.25X0.85MM_NO_SILK]  12.44,23.27 0 top
JP890  [1X01_SMD_3.25X0.85MM_NO_SILK]  12.44,22 0 top
JP891  [1X01_SMD_3.25X0.85MM_NO_SILK]  12.44,20.73 0 top
JP892  [1X01_SMD_3.25X0.85MM_NO_SILK]  12.44,19.46 0 top
JP893  [1X01_SMD_3.25X0.85MM_NO_SILK]  12.44,18.19 0 top
JP894  [1X01_SMD_3.25X0.85MM_NO_SILK]  12.44,16.92 0 top
JP895  [1X01_SMD_3.25X0.85MM_NO_SILK]  12.44,15.65 0 top
JP896  [1X01_SMD_3.25X0.85MM_NO_SILK]  12.44,14.38 0 top
JP897  [1X01_SMD_3.25X0.85MM_NO_SILK]  12.44,13.11 0 top
JP898  [1X01_SMD_3.25X0.85MM_NO_SILK]  12.44,11.84 0 top
JP899  [1X01_SMD_3.25X0.85MM_NO_SILK]  12.44,10.57 0 top
JP900  [1X01_SMD_3.25X0.85MM_NO_SILK]  12.44,9.3 0 top
JP901  [1X01_SMD_3.25X0.85MM_NO_SILK]  12.44,84.23 0 bottom
JP902  [1X01_SMD_3.25X0.85MM_NO_SILK]  12.44,82.96 0 bottom
JP903  [1X01_SMD_3.25X0.85MM_NO_SILK]  12.44,81.69 0 bottom
JP904  [1X01_SMD_3.25X0.85MM_NO_SILK]  12.44,80.42 0 bottom
JP905  [1X01_SMD_3.25X0.85MM_NO_SILK]  12.44,79.15 0 bottom
JP906  [1X01_SMD_3.25X0.85MM_NO_SILK]  12.44,77.88 0 bottom
JP907  [1X01_SMD_3.25X0.85MM_NO_SILK]  12.44,76.61 0 bottom
JP908  [1X01_SMD_3.25X0.85MM_NO_SILK]  12.44,75.34 0 bottom
JP909  [1X01_SMD_3.25X0.85MM_NO_SILK]  12.44,74.07 0 bottom
JP910  [1X01_SMD_3.25X0.85MM_NO_SILK]  12.44,72.8 0 bottom
JP911  [1X01_SMD_3.25X0.85MM_NO_SILK]  12.44,71.53 0 bottom
JP912  [1X01_SMD_3.25X0.85MM_NO_SILK]  12.44,70.26 0 bottom
JP913  [1X01_SMD_3.25X0.85MM_NO_SILK]  12.44,68.99 0 bottom
JP914  [1X01_SMD_3.25X0.85MM_NO_SILK]  12.44,67.72 0 bottom
JP915  [1X01_SMD_3.25X0.85MM_NO_SILK]  12.44,66.45 0 bottom
JP916  [1X01_SMD_3.25X0.85MM_NO_SILK]  12.44,65.18 0 bottom
JP917  [1X01_SMD_3.25X0.85MM_NO_SILK]  12.44,63.91 0 bottom
JP918  [1X01_SMD_3.25X0.85MM_NO_SILK]  12.44,62.64 0 bottom
JP919  [1X01_SMD_3.25X0.85MM_NO_SILK]  12.44,61.37 0 bottom
JP920  [1X01_SMD_3.25X0.85MM_NO_SILK]  12.44,60.1 0 bottom
JP921  [1X01_SMD_3.25X0.85MM_NO_SILK]  12.44,58.83 0 bottom
JP922  [1X01_SMD_3.25X0.85MM_NO_SILK]  12.44,57.56 0 bottom
JP923  [1X01_SMD_3.25X0.85MM_NO_SILK]  12.44,56.29 0 bottom
JP924  [1X01_SMD_3.25X0.85MM_NO_SILK]  12.44,55.02 0 bottom
JP925  [1X01_SMD_3.25X0.85MM_NO_SILK]  12.44,53.75 0 bottom
JP926  [1X01_SMD_3.25X0.85MM_NO_SILK]  12.44,52.48 0 bottom
JP927  [1X01_SMD_3.25X0.85MM_NO_SILK]  12.44,51.21 0 bottom
JP928  [1X01_SMD_3.25X0.85MM_NO_SILK]  12.44,49.94 0 bottom
JP929  [1X01_SMD_3.25X0.85MM_NO_SILK]  12.44,48.67 0 bottom
JP930  [1X01_SMD_3.25X0.85MM_NO_SILK]  12.44,47.4 0 bottom
JP931  [1X01_SMD_3.25X0.85MM_NO_SILK]  12.44,46.13 0 bottom
JP932  [1X01_SMD_3.25X0.85MM_NO_SILK]  12.44,44.86 0 bottom
JP933  [1X01_SMD_3.25X0.85MM_NO_SILK]  12.44,43.59 0 bottom
JP934  [1X01_SMD_3.25X0.85MM_NO_SILK]  12.44,42.32 0 bottom
JP935  [1X01_SMD_3.25X0.85MM_NO_SILK]  12.44,41.05 0 bottom
JP936  [1X01_SMD_3.25X0.85MM_NO_SILK]  12.44,39.78 0 bottom
JP937  [1X01_SMD_3.25X0.85MM_NO_SILK]  12.44,38.51 0 bottom
JP938  [1X01_SMD_3.25X0.85MM_NO_SILK]  12.44,37.24 0 bottom
JP939  [1X01_SMD_3.25X0.85MM_NO_SILK]  12.44,35.97 0 bottom
JP940  [1X01_SMD_3.25X0.85MM_NO_SILK]  12.44,34.7 0 bottom
JP941  [1X01_SMD_3.25X0.85MM_NO_SILK]  12.44,33.43 0 bottom
JP942  [1X01_SMD_3.25X0.85MM_NO_SILK]  12.44,32.16 0 bottom
JP943  [1X01_SMD_3.25X0.85MM_NO_SILK]  12.44,30.89 0 bottom
JP944  [1X01_SMD_3.25X0.85MM_NO_SILK]  12.44,29.62 0 bottom
JP945  [1X01_SMD_3.25X0.85MM_NO_SILK]  12.44,28.35 0 bottom
JP946  [1X01_SMD_3.25X0.85MM_NO_SILK]  12.44,27.08 0 bottom
JP947  [1X01_SMD_3.25X0.85MM_NO_SILK]  12.44,25.81 0 bottom
JP948  [1X01_SMD_3.25X0.85MM_NO_SILK]  12.44,24.54 0 bottom
JP949  [1X01_SMD_3.25X0.85MM_NO_SILK]  12.44,23.27 0 bottom
JP950  [1X01_SMD_3.25X0.85MM_NO_SILK]  12.44,22 0 bottom
JP951  [1X01_SMD_3.25X0.85MM_NO_SILK]  12.44,20.73 0 bottom
JP952  [1X01_SMD_3.25X0.85MM_NO_SILK]  12.44,19.46 0 bottom
JP953  [1X01_SMD_3.25X0.85MM_NO_SILK]  12.44,18.19 0 bottom
JP954  [1X01_SMD_3.25X0.85MM_NO_SILK]  12.44,16.92 0 bottom
JP955  [1X01_SMD_3.25X0.85MM_NO_SILK]  12.44,15.65 0 bottom
JP956  [1X01_SMD_3.25X0.85MM_NO_SILK]  12.44,14.38 0 bottom
JP957  [1X01_SMD_3.25X0.85MM_NO_SILK]  12.44,13.11 0 bottom
JP958  [1X01_SMD_3.25X0.85MM_NO_SILK]  12.44,11.84 0 bottom
JP959  [1X01_SMD_3.25X0.85MM_NO_SILK]  12.44,10.57 0 bottom
JP960  [1X01_SMD_3.25X0.85MM_NO_SILK]  12.44,9.3 0 bottom
JP961  [1X01_SMD_3.25X0.85MM_NO_SILK]  60.58,84.33 0 bottom
JP962  [1X01_SMD_3.25X0.85MM_NO_SILK]  60.58,83.06 0 bottom
JP963  [1X01_SMD_3.25X0.85MM_NO_SILK]  60.58,81.79 0 bottom
JP964  [1X01_SMD_3.25X0.85MM_NO_SILK]  60.58,80.52 0 bottom
JP965  [1X01_SMD_3.25X0.85MM_NO_SILK]  60.58,79.25 0 bottom
JP966  [1X01_SMD_3.25X0.85MM_NO_SILK]  60.58,77.98 0 bottom
JP967  [1X01_SMD_3.25X0.85MM_NO_SILK]  60.58,76.71 0 bottom
JP968  [1X01_SMD_3.25X0.85MM_NO_SILK]  60.58,75.44 0 bottom
JP969  [1X01_SMD_3.25X0.85MM_NO_SILK]  60.58,74.17 0 bottom
JP970  [1X01_SMD_3.25X0.85MM_NO_SILK]  60.58,72.9 0 bottom
JP971  [1X01_SMD_3.25X0.85MM_NO_SILK]  60.58,71.63 0 bottom
JP972  [1X01_SMD_3.25X0.85MM_NO_SILK]  60.58,70.36 0 bottom
JP973  [1X01_SMD_3.25X0.85MM_NO_SILK]  60.58,69.09 0 bottom
JP974  [1X01_SMD_3.25X0.85MM_NO_SILK]  60.58,67.82 0 bottom
JP975  [1X01_SMD_3.25X0.85MM_NO_SILK]  60.58,66.55 0 bottom
JP976  [1X01_SMD_3.25X0.85MM_NO_SILK]  60.58,65.28 0 bottom
JP977  [1X01_SMD_3.25X0.85MM_NO_SILK]  60.58,64.01 0 bottom
JP978  [1X01_SMD_3.25X0.85MM_NO_SILK]  60.58,62.74 0 bottom
JP979  [1X01_SMD_3.25X0.85MM_NO_SILK]  60.58,61.47 0 bottom
JP980  [1X01_SMD_3.25X0.85MM_NO_SILK]  60.58,60.2 0 bottom
JP981  [1X01_SMD_3.25X0.85MM_NO_SILK]  60.58,58.93 0 bottom
JP982  [1X01_SMD_3.25X0.85MM_NO_SILK]  60.58,57.66 0 bottom
JP983  [1X01_SMD_3.25X0.85MM_NO_SILK]  60.58,56.39 0 bottom
JP984  [1X01_SMD_3.25X0.85MM_NO_SILK]  60.58,55.12 0 bottom
JP985  [1X01_SMD_3.25X0.85MM_NO_SILK]  60.58,53.85 0 bottom
JP986  [1X01_SMD_3.25X0.85MM_NO_SILK]  60.58,52.58 0 bottom
JP987  [1X01_SMD_3.25X0.85MM_NO_SILK]  60.58,51.31 0 bottom
JP988  [1X01_SMD_3.25X0.85MM_NO_SILK]  60.58,50.04 0 bottom
JP989  [1X01_SMD_3.25X0.85MM_NO_SILK]  60.58,48.77 0 bottom
JP990  [1X01_SMD_3.25X0.85MM_NO_SILK]  60.58,47.5 0 bottom
JP991  [1X01_SMD_3.25X0.85MM_NO_SILK]  60.58,46.23 0 bottom
JP992  [1X01_SMD_3.25X0.85MM_NO_SILK]  60.58,44.96 0 bottom
JP993  [1X01_SMD_3.25X0.85MM_NO_SILK]  60.58,43.69 0 bottom
JP994  [1X01_SMD_3.25X0.85MM_NO_SILK]  60.58,42.42 0 bottom
JP995  [1X01_SMD_3.25X0.85MM_NO_SILK]  60.58,41.15 0 bottom
JP996  [1X01_SMD_3.25X0.85MM_NO_SILK]  60.58,39.88 0 bottom
JP997  [1X01_SMD_3.25X0.85MM_NO_SILK]  60.58,38.61 0 bottom
JP998  [1X01_SMD_3.25X0.85MM_NO_SILK]  60.58,37.34 0 bottom
JP999  [1X01_SMD_3.25X0.85MM_NO_SILK]  60.58,36.07 0 bottom
JP1000  [1X01_SMD_3.25X0.85MM_NO_SILK]  60.58,34.8 0 bottom
JP1001  [1X01_SMD_3.25X0.85MM_NO_SILK]  60.58,33.53 0 bottom
JP1002  [1X01_SMD_3.25X0.85MM_NO_SILK]  60.58,32.26 0 bottom
JP1003  [1X01_SMD_3.25X0.85MM_NO_SILK]  60.58,30.99 0 bottom
JP1004  [1X01_SMD_3.25X0.85MM_NO_SILK]  60.58,29.72 0 bottom
JP1005  [1X01_SMD_3.25X0.85MM_NO_SILK]  60.58,28.45 0 bottom
JP1006  [1X01_SMD_3.25X0.85MM_NO_SILK]  60.58,27.18 0 bottom
JP1007  [1X01_SMD_3.25X0.85MM_NO_SILK]  60.58,25.91 0 bottom
JP1008  [1X01_SMD_3.25X0.85MM_NO_SILK]  60.58,24.64 0 bottom
JP1009  [1X01_SMD_3.25X0.85MM_NO_SILK]  60.58,23.37 0 bottom
JP1010  [1X01_SMD_3.25X0.85MM_NO_SILK]  60.58,22.1 0 bottom
JP1011  [1X01_SMD_3.25X0.85MM_NO_SILK]  60.58,20.83 0 bottom
JP1012  [1X01_SMD_3.25X0.85MM_NO_SILK]  60.58,19.56 0 bottom
JP1013  [1X01_SMD_3.25X0.85MM_NO_SILK]  60.58,18.29 0 bottom
JP1014  [1X01_SMD_3.25X0.85MM_NO_SILK]  60.58,17.02 0 bottom
JP1015  [1X01_SMD_3.25X0.85MM_NO_SILK]  60.58,15.75 0 bottom
JP1016  [1X01_SMD_3.25X0.85MM_NO_SILK]  60.58,14.48 0 bottom
JP1017  [1X01_SMD_3.25X0.85MM_NO_SILK]  60.58,13.21 0 bottom
JP1018  [1X01_SMD_3.25X0.85MM_NO_SILK]  60.58,11.94 0 bottom
JP1019  [1X01_SMD_3.25X0.85MM_NO_SILK]  60.58,10.67 0 bottom
JP1020  [1X01_SMD_3.25X0.85MM_NO_SILK]  60.58,9.4 0 bottom
JP1021  [1X01_SMD_3.25X0.85MM_NO_SILK]  65.91,84.33 0 bottom
JP1022  [1X01_SMD_3.25X0.85MM_NO_SILK]  65.91,83.06 0 bottom
JP1023  [1X01_SMD_3.25X0.85MM_NO_SILK]  65.91,81.79 0 bottom
JP1024  [1X01_SMD_3.25X0.85MM_NO_SILK]  65.84,78.01 180 bottom
JP1025  [1X01_SMD_3.25X0.85MM_NO_SILK]  65.84,79.28 180 bottom
JP1026  [1X01_SMD_3.25X0.85MM_NO_SILK]  65.84,80.55 180 bottom
JP1027  [1X01_SMD_3.25X0.85MM_NO_SILK]  65.91,76.71 0 bottom
JP1028  [1X01_SMD_3.25X0.85MM_NO_SILK]  65.91,75.44 0 bottom
JP1029  [1X01_SMD_3.25X0.85MM_NO_SILK]  65.91,74.17 0 bottom
JP1030  [1X01_SMD_3.25X0.85MM_NO_SILK]  65.91,72.9 0 bottom
JP1031  [1X01_SMD_3.25X0.85MM_NO_SILK]  65.91,71.63 0 bottom
JP1032  [1X01_SMD_3.25X0.85MM_NO_SILK]  65.91,70.36 0 bottom
JP1033  [1X01_SMD_3.25X0.85MM_NO_SILK]  65.91,69.09 0 bottom
JP1034  [1X01_SMD_3.25X0.85MM_NO_SILK]  65.91,67.82 0 bottom
JP1035  [1X01_SMD_3.25X0.85MM_NO_SILK]  65.91,66.55 0 bottom
JP1036  [1X01_SMD_3.25X0.85MM_NO_SILK]  65.91,65.28 0 bottom
JP1037  [1X01_SMD_3.25X0.85MM_NO_SILK]  65.91,64.01 0 bottom
JP1038  [1X01_SMD_3.25X0.85MM_NO_SILK]  65.91,62.74 0 bottom
JP1039  [1X01_SMD_3.25X0.85MM_NO_SILK]  65.91,61.47 0 bottom
JP1040  [1X01_SMD_3.25X0.85MM_NO_SILK]  65.91,60.2 0 bottom
JP1041  [1X01_SMD_3.25X0.85MM_NO_SILK]  65.91,58.93 0 bottom
JP1042  [1X01_SMD_3.25X0.85MM_NO_SILK]  65.91,57.66 0 bottom
JP1043  [1X01_SMD_3.25X0.85MM_NO_SILK]  65.91,56.39 0 bottom
JP1044  [1X01_SMD_3.25X0.85MM_NO_SILK]  65.91,55.12 0 bottom
JP1045  [1X01_SMD_3.25X0.85MM_NO_SILK]  65.91,53.85 0 bottom
JP1046  [1X01_SMD_3.25X0.85MM_NO_SILK]  65.91,52.58 0 bottom
JP1047  [1X01_SMD_3.25X0.85MM_NO_SILK]  65.91,51.31 0 bottom
JP1048  [1X01_SMD_3.25X0.85MM_NO_SILK]  65.91,50.04 0 bottom
JP1049  [1X01_SMD_3.25X0.85MM_NO_SILK]  65.91,48.77 0 bottom
JP1050  [1X01_SMD_3.25X0.85MM_NO_SILK]  65.91,47.5 0 bottom
JP1051  [1X01_SMD_3.25X0.85MM_NO_SILK]  65.91,46.23 0 bottom
JP1052  [1X01_SMD_3.25X0.85MM_NO_SILK]  65.91,44.96 0 bottom
JP1053  [1X01_SMD_3.25X0.85MM_NO_SILK]  65.91,43.69 0 bottom
JP1054  [1X01_SMD_3.25X0.85MM_NO_SILK]  65.91,42.42 0 bottom
JP1055  [1X01_SMD_3.25X0.85MM_NO_SILK]  65.91,39.87 180 bottom
JP1056  [1X01_SMD_3.25X0.85MM_NO_SILK]  65.91,41.14 180 bottom
JP1057  [1X01_SMD_3.25X0.85MM_NO_SILK]  65.91,38.61 0 bottom
JP1058  [1X01_SMD_3.25X0.85MM_NO_SILK]  65.91,37.34 0 bottom
JP1059  [1X01_SMD_3.25X0.85MM_NO_SILK]  65.91,36.07 0 bottom
JP1060  [1X01_SMD_3.25X0.85MM_NO_SILK]  65.91,34.8 0 bottom
JP1061  [1X01_SMD_3.25X0.85MM_NO_SILK]  65.87,31.04 180 bottom
JP1062  [1X01_SMD_3.25X0.85MM_NO_SILK]  65.87,32.31 180 bottom
JP1063  [1X01_SMD_3.25X0.85MM_NO_SILK]  65.87,33.58 180 bottom
JP1064  [1X01_SMD_3.25X0.85MM_NO_SILK]  65.91,29.72 0 bottom
JP1065  [1X01_SMD_3.25X0.85MM_NO_SILK]  65.81,14.54 180 bottom
JP1066  [1X01_SMD_3.25X0.85MM_NO_SILK]  65.81,15.81 180 bottom
JP1067  [1X01_SMD_3.25X0.85MM_NO_SILK]  65.81,17.08 180 bottom
JP1068  [1X01_SMD_3.25X0.85MM_NO_SILK]  65.81,18.35 180 bottom
JP1069  [1X01_SMD_3.25X0.85MM_NO_SILK]  65.82,9.45 180 bottom
JP1070  [1X01_SMD_3.25X0.85MM_NO_SILK]  65.82,10.72 180 bottom
JP1071  [1X01_SMD_3.25X0.85MM_NO_SILK]  65.82,11.99 180 bottom
JP1072  [1X01_SMD_3.25X0.85MM_NO_SILK]  65.82,13.26 180 bottom
JP1073  [1X01_SMD_3.25X0.85MM_NO_SILK]  65.89,28.47 0 bottom
JP1074  [1X01_SMD_3.25X0.85MM_NO_SILK]  65.89,27.2 0 bottom
JP1075  [1X01_SMD_3.25X0.85MM_NO_SILK]  65.83,19.52 180 bottom
JP1076  [1X01_SMD_3.25X0.85MM_NO_SILK]  65.83,20.79 180 bottom
JP1077  [1X01_SMD_3.25X0.85MM_NO_SILK]  65.83,22.06 180 bottom
JP1078  [1X01_SMD_3.25X0.85MM_NO_SILK]  65.83,23.33 180 bottom
JP1079  [1X01_SMD_3.25X0.85MM_NO_SILK]  65.83,24.6 180 bottom
JP1080  [1X01_SMD_3.25X0.85MM_NO_SILK]  65.83,25.87 180 bottom
JP1081  [1X01_SMD_3.25X0.85MM_NO_SILK]  6.96,84.23 0 bottom
JP1082  [1X01_SMD_3.25X0.85MM_NO_SILK]  6.96,82.96 0 bottom
JP1083  [1X01_SMD_3.25X0.85MM_NO_SILK]  6.96,81.69 0 bottom
JP1084  [1X01_SMD_3.25X0.85MM_NO_SILK]  6.96,80.42 0 bottom
JP1085  [1X01_SMD_3.25X0.85MM_NO_SILK]  6.96,79.15 0 bottom
JP1086  [1X01_SMD_3.25X0.85MM_NO_SILK]  6.96,77.88 0 bottom
JP1087  [1X01_SMD_3.25X0.85MM_NO_SILK]  6.96,76.61 0 bottom
JP1088  [1X01_SMD_3.25X0.85MM_NO_SILK]  6.96,75.34 0 bottom
JP1089  [1X01_SMD_3.25X0.85MM_NO_SILK]  6.96,74.07 0 bottom
JP1090  [1X01_SMD_3.25X0.85MM_NO_SILK]  6.96,72.8 0 bottom
JP1091  [1X01_SMD_3.25X0.85MM_NO_SILK]  6.96,71.53 0 bottom
JP1092  [1X01_SMD_3.25X0.85MM_NO_SILK]  6.96,70.26 0 bottom
JP1093  [1X01_SMD_3.25X0.85MM_NO_SILK]  6.96,68.99 0 bottom
JP1094  [1X01_SMD_3.25X0.85MM_NO_SILK]  6.96,67.72 0 bottom
JP1095  [1X01_SMD_3.25X0.85MM_NO_SILK]  6.96,66.45 0 bottom
JP1096  [1X01_SMD_3.25X0.85MM_NO_SILK]  6.96,65.18 0 bottom
JP1097  [1X01_SMD_3.25X0.85MM_NO_SILK]  6.96,63.91 0 bottom
JP1098  [1X01_SMD_3.25X0.85MM_NO_SILK]  6.96,62.64 0 bottom
JP1099  [1X01_SMD_3.25X0.85MM_NO_SILK]  6.96,61.37 0 bottom
JP1100  [1X01_SMD_3.25X0.85MM_NO_SILK]  6.96,60.1 0 bottom
JP1101  [1X01_SMD_3.25X0.85MM_NO_SILK]  6.96,58.83 0 bottom
JP1102  [1X01_SMD_3.25X0.85MM_NO_SILK]  6.96,57.56 0 bottom
JP1103  [1X01_SMD_3.25X0.85MM_NO_SILK]  6.96,56.29 0 bottom
JP1104  [1X01_SMD_3.25X0.85MM_NO_SILK]  6.96,55.02 0 bottom
JP1105  [1X01_SMD_3.25X0.85MM_NO_SILK]  6.96,53.75 0 bottom
JP1106  [1X01_SMD_3.25X0.85MM_NO_SILK]  6.96,52.48 0 bottom
JP1107  [1X01_SMD_3.25X0.85MM_NO_SILK]  6.96,51.21 0 bottom
JP1108  [1X01_SMD_3.25X0.85MM_NO_SILK]  6.96,49.94 0 bottom
JP1109  [1X01_SMD_3.25X0.85MM_NO_SILK]  6.96,48.67 0 bottom
JP1110  [1X01_SMD_3.25X0.85MM_NO_SILK]  6.96,47.4 0 bottom
JP1111  [1X01_SMD_3.25X0.85MM_NO_SILK]  6.96,46.13 0 bottom
JP1112  [1X01_SMD_3.25X0.85MM_NO_SILK]  6.96,44.86 0 bottom
JP1113  [1X01_SMD_3.25X0.85MM_NO_SILK]  6.96,43.59 0 bottom
JP1114  [1X01_SMD_3.25X0.85MM_NO_SILK]  6.96,42.32 0 bottom
JP1115  [1X01_SMD_3.25X0.85MM_NO_SILK]  6.96,41.05 0 bottom
JP1116  [1X01_SMD_3.25X0.85MM_NO_SILK]  6.96,39.78 0 bottom
JP1117  [1X01_SMD_3.25X0.85MM_NO_SILK]  6.96,38.51 0 bottom
JP1118  [1X01_SMD_3.25X0.85MM_NO_SILK]  6.96,37.24 0 bottom
JP1119  [1X01_SMD_3.25X0.85MM_NO_SILK]  6.96,35.97 0 bottom
JP1120  [1X01_SMD_3.25X0.85MM_NO_SILK]  6.96,34.7 0 bottom
JP1121  [1X01_SMD_3.25X0.85MM_NO_SILK]  6.96,33.43 0 bottom
JP1122  [1X01_SMD_3.25X0.85MM_NO_SILK]  6.96,32.16 0 bottom
JP1123  [1X01_SMD_3.25X0.85MM_NO_SILK]  6.96,30.89 0 bottom
JP1124  [1X01_SMD_3.25X0.85MM_NO_SILK]  6.96,29.62 0 bottom
JP1125  [1X01_SMD_3.25X0.85MM_NO_SILK]  6.96,28.35 0 bottom
JP1126  [1X01_SMD_3.25X0.85MM_NO_SILK]  6.96,27.08 0 bottom
JP1127  [1X01_SMD_3.25X0.85MM_NO_SILK]  6.96,25.81 0 bottom
JP1128  [1X01_SMD_3.25X0.85MM_NO_SILK]  6.96,24.54 0 bottom
JP1129  [1X01_SMD_3.25X0.85MM_NO_SILK]  6.96,14.31 0 bottom
JP1130  [1X01_SMD_3.25X0.85MM_NO_SILK]  6.93,16.87 0 bottom
JP1131  [1X01_SMD_3.25X0.85MM_NO_SILK]  6.92,13.05 180 bottom
JP1132  [1X01_SMD_3.25X0.85MM_NO_SILK]  6.89,18.15 180 bottom
JP1133  [1X01_SMD_3.25X0.85MM_NO_SILK]  6.89,19.42 180 bottom
JP1134  [1X01_SMD_3.25X0.85MM_NO_SILK]  6.98,10.52 0 bottom
JP1135  [1X01_SMD_3.25X0.85MM_NO_SILK]  6.98,9.25 0 bottom
JP1136  [1X01_SMD_3.25X0.85MM_NO_SILK]  6.92,23.17 180 bottom
JP1137  [1X01_SMD_3.25X0.85MM_NO_SILK]  6.94,11.81 180 bottom
JP1138  [1X01_SMD_3.25X0.85MM_NO_SILK]  6.95,20.58 0 bottom
JP1139  [1X01_SMD_3.25X0.85MM_NO_SILK]  6.9,15.57 180 bottom
JP1140  [1X01_SMD_3.25X0.85MM_NO_SILK]  6.94,21.85 180 bottom
JP1141  [1X01_SMD_3.25X0.85MM_NO_SILK]  40.86,89.49 270 bottom
JP1142  [1X01_SMD_3.25X0.85MM_NO_SILK]  42.13,89.49 270 bottom
JP1143  [1X01_SMD_3.25X0.85MM_NO_SILK]  43.4,89.49 270 bottom
JP1144  [1X01_SMD_3.25X0.85MM_NO_SILK]  44.67,89.49 270 bottom
JP1145  [1X01_SMD_3.25X0.85MM_NO_SILK]  45.94,89.49 270 bottom
JP1146  [1X01_SMD_3.25X0.85MM_NO_SILK]  47.21,89.49 270 bottom
JP1147  [1X01_SMD_3.25X0.85MM_NO_SILK]  48.48,89.49 270 bottom